# EAGLE board PCB 2D (EAGLE 9.7.0)
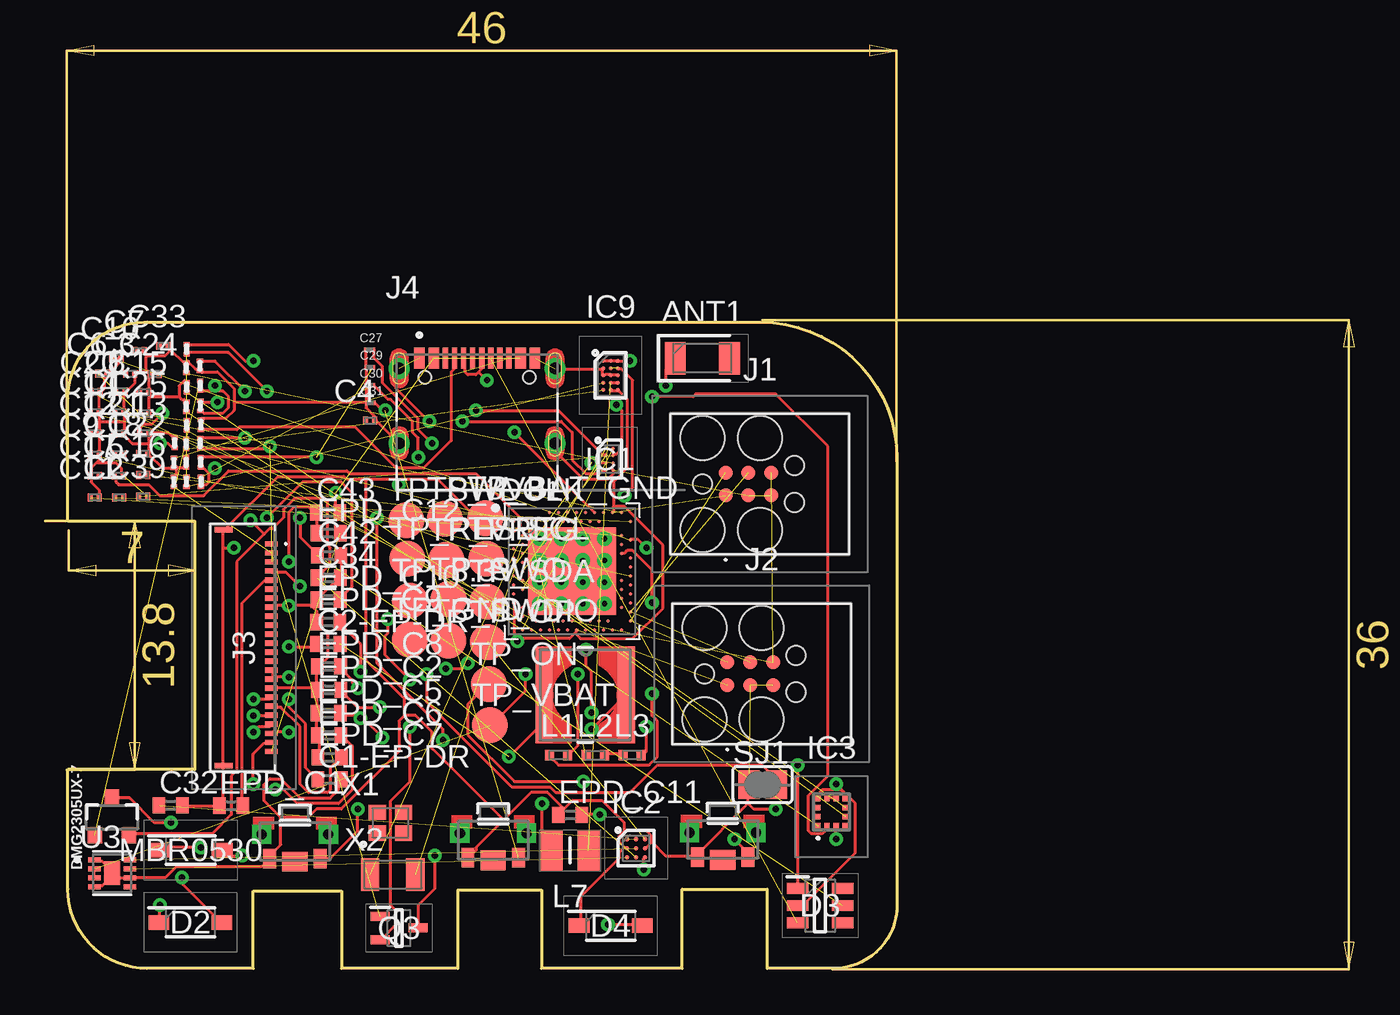
[diagram p0: board, top side]
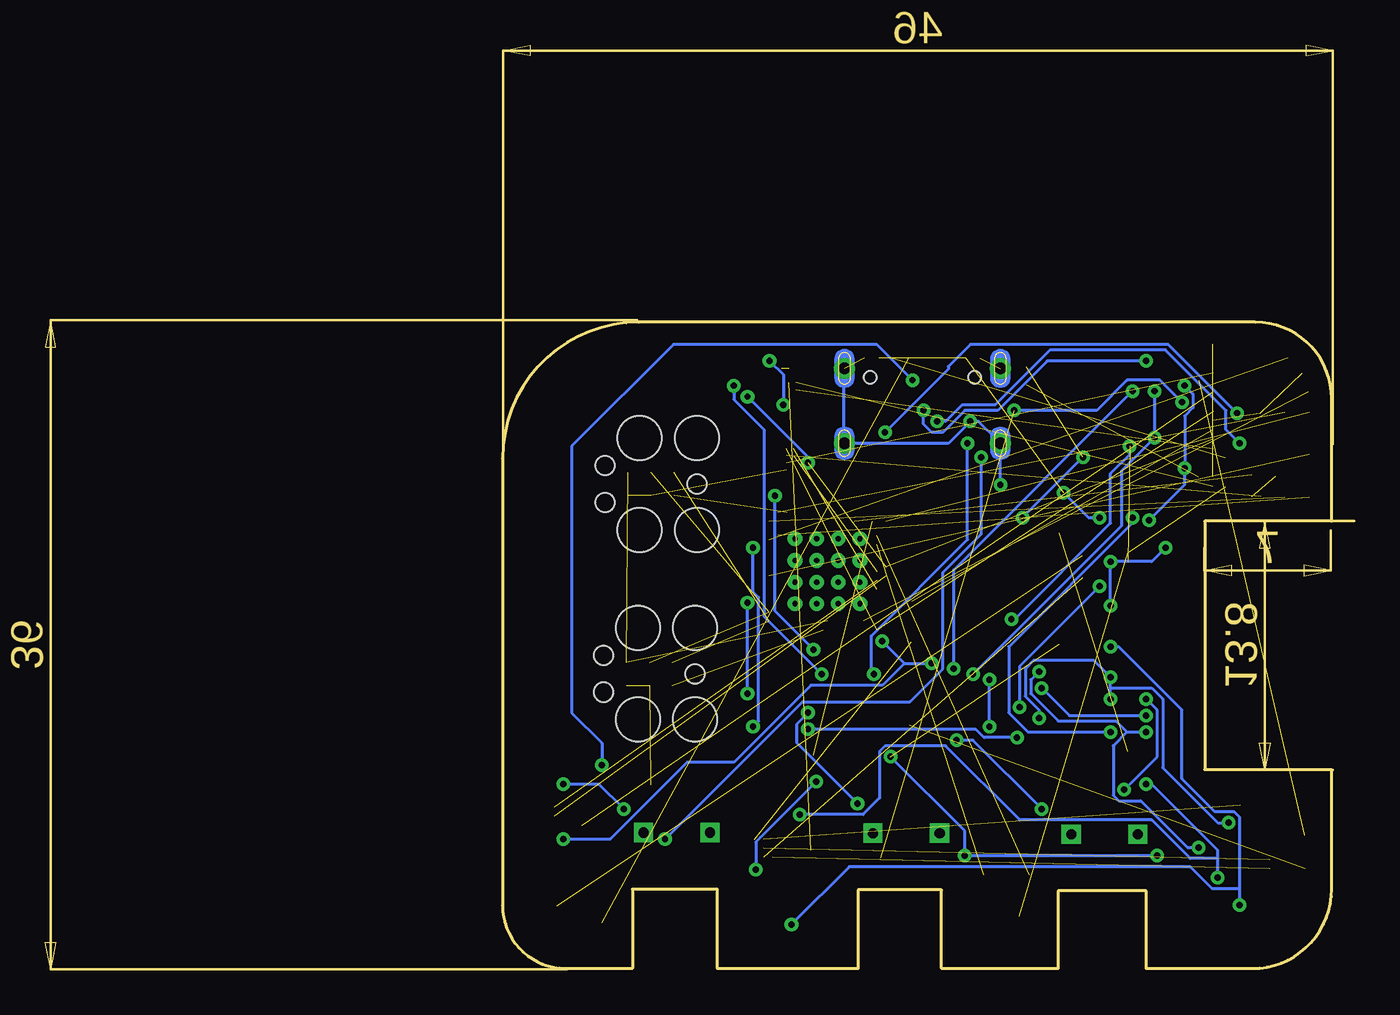
[diagram p1: board, bottom side, seen from below]

Size 45.96 x 35.83 mm. Coordinates in mm from the lower left corner, seen from the top.
Outline: 4.22,35.83 38.42,35.83 arc-90 45.96,28.28 45.96,3.49 arc-90 42.47,0 38.76,0 38.76,4.39 34.05,4.39 34.05,0 26.25,0 26.25,4.35 21.62,4.35 21.62,0 15.17,0 15.17,4.29 10.28,4.29 10.28,0 4.4,0 arc-90 0,4.4 0,11.02 7.04,11.02 7.04,24.8 0,24.8 0,31.6 arc-90 4.22,35.83
Copper layers (1*16): Top 0.035mm / dielectric 1.5mm / Bottom 0.035mm
Design rules "Fusion Electronics Design Rules *": minimum track width 6mil, minimum drill 0.35mm, track to track 6mil, track to pad 6mil, pad to pad 6mil, via to via 6mil, smd to smd 6mil, copper to edge 40mil, drill to drill 6mil, minimum pad ring 10mil, minimum via ring 8mil, stop-mask expansion 4mil, vias tented up to drill 9999mil, thermal gap 10mil

## Footprints (pad centres in the part's own frame; a part is rotated, then mirrored left to right if it is on the bottom)
2450AT18B100E_ANTC3216X140N = smd 1.15 x 1.8: 1 -1.5,0; 2 1.5,0
NORDIC_NRF_3_RESC0201_L = smd 0.28 x 0.43: 1 -0.255,0; 2 0.255,0
ESP32_C6_LIBRARY_1_ESP32_WROVER_EAGLE-LTSPICE_C0402 = smd 0.7 x 0.9: 1 -0.65,0; 2 0.65,0
GRM011R60J152KE01L_1_0201 = smd 0.35 x 0.25: 1 0,0.275; 2 0,-0.275
GRM011R60J152KE01L_2_CAPC0201X13N = smd 0.22 x 0.23: 1 -0.185,0; 2 0.185,0
ESP32_C6_LIBRARY_5_SOD3716X135N = smd 1.15 x 0.8: 1 -1.75,0; 2 1.75,0
ESP32_C6_LIBRARY_3_SOT95P280X145-6N = smd 1.2 x 0.6: 1 -1.25,0.95; 2 -1.25,0; 3 -1.25,-0.95; 4 1.25,-0.95; 5 1.25,0; 6 1.25,0.95
ESP32_C6_LIBRARY_4_ESP32_C6_LIBRARY_4_ESP32_C6_LIBRARY_4_ESP32_C6_LIBRARY_4_ESP32_WROVER_SPARKFUN-DISCRETESEMI_SOT23-3 = smd 0.8 x 0.9: 1 -0.95,-1; 2 0.95,-1; 3 0,1.1
BQ25180YBGR_BGA8C40P2X4_100X155X50 = smd 0.2 x 0.2: A1 -0.2,0.6; A2 0.2,0.6; B1 -0.2,0.2; B2 0.2,0.2; C1 -0.2,-0.2; C2 0.2,-0.2; D1 -0.2,-0.6; D2 0.2,-0.6
DRV2605YZFR_BGA9C50P3X3_144X144X62 = smd 0.25 x 0.25: A1 -0.5,0.5; A2 0,0.5; A3 0.5,0.5; B1 -0.5,0; B2 0,0; B3 0.5,0; C1 -0.5,-0.5; C2 0,-0.5; C3 0.5,-0.5
BMA423_BMA423 = smd 0.3 x 0.35: 1 -0.75,-0.775; 2 -0.25,-0.775; 3 0.25,-0.775; 4 0.75,-0.775; 7 0.75,0.775; 8 0.25,0.775; 9 -0.25,0.775; 10 -0.75,0.775 | smd 0.35 x 0.3: 5 0.775,-0.25; 6 0.775,0.25; 11 -0.775,0.25; 12 -0.775,-0.25
RT6160AWSC_BGA15C40P3X5_140X230X60 = smd 0.216 x 0.216: A1 -0.4,0.8; A2 0,0.8; A3 0.4,0.8; B1 -0.4,0.4; B2 0,0.4; B3 0.4,0.4; C1 -0.4,0; C2 0,0; C3 0.4,0; D1 -0.4,-0.4; D2 0,-0.4; D3 0.4,-0.4; E1 -0.4,-0.8; E2 0,-0.8; E3 0.4,-0.8
TC2030-IDC_TC2030IDC = smd 0.783 x 0.783: 1 -0.953,-0.635; 2 -0.953,0.635; 3 0.317,-0.635; 4 0.317,0.635; 5 1.588,-0.635; 6 1.588,0.635 | hole 2.451: -2.223,-2.54; -2.223,2.54; 0.952,-2.54; 0.952,2.54 | hole 1.067: -2.223,0; 2.857,-1.016; 2.857,1.016
503480-2400_5034802400 = smd 0.3 x 0.7: 1 -5.75,1.525; 2 -5.25,1.525; 3 -4.75,1.525; 4 -4.25,1.525; 5 -3.75,1.525; 6 -3.25,1.525; 7 -2.75,1.525; 8 -2.25,1.525; 9 -1.75,1.525; 10 -1.25,1.525; 11 -0.75,1.525; 12 -0.25,1.525; 13 0.25,1.525; 14 0.75,1.525; 15 1.25,1.525; 16 1.75,1.525; 17 2.25,1.525; 18 2.75,1.525; 19 3.25,1.525; 20 3.75,1.525; 21 4.25,1.525; 22 4.75,1.525; 23 5.25,1.525; 24 5.75,1.525 | smd 0.3 x 1: MP1 -6.54,-1.125; MP2 6.54,-1.125
KH-TYPE-C-16P_KINGHELM_KH-TYPE-C-16P = smd 0.6 x 1.15: A1_B12 -3.2,4.725; A4_B9 -2.4,4.725; A9_B4 2.4,4.725; A12_B1 3.2,4.725 | smd 0.3 x 1.15: A5 -1.25,4.725; A6 -0.25,4.725; A7 0.25,4.725; A8 1.25,4.725; B5 1.75,4.725; B6 0.75,4.725; B7 -0.75,4.725; B8 -1.75,4.725 | drill 0.65 pad 1.05: SH1 -4.32,0; SH2 4.32,0; SH3 -4.32,4.15; SH4 4.32,4.15 | hole 0.7: -2.89,3.65; 2.89,3.65
NORDIC_NRF_2_RESC0402_L = smd 0.5 x 0.6: 1 -0.5,0; 2 0.5,0
ESP32_C6_LIBRARY_2_IND_4828-WE-TPC_WRE = smd 0.9 x 5.3: 1 -2.286,0; 2 2.286,0
MLP2016SR47MT0S1_INDC2016X100N = smd 1.2 x 2.2: 1 -1.028,0; 2 1.028,0
ESP32_C6_LIBRARY_6_SOT65P210X110-3N = smd 1.05 x 0.5: 1 -1.05,0.65; 2 -1.05,-0.65; 3 1.05,0
CPF0201D7K68C1_0201 = smd 0.35 x 0.25: 1 0,0.275; 2 0,-0.275
ESP32_C6_LIBRARY_7_JUMPER_SJ = smd 1.168 x 1.6: 1 -0.762,0; 2 0.762,0
2025-10-22_07-23-44_LIBRARY_SW_EVP-AKE31A_PAN = smd 0.711 x 1.092: 1 -1.4,-0.972; 2 1.4,-0.972 | drill 0.559 pad 0.914 square: 3 -1.848,0.381; 4 1.848,0.381 | smd 1.397 x 1.092: 5 0,-1.124
HECTOR_WATCH_1_TP20R = smd 2 x 2: TP 0,0
NORDIC_NRF_4_AQFN50P700X700X85_HS-74N = smd 4.85 x 4.85: P$74 0,0 | drill 0.3 pad 0.6: P$75 -1.8,1.8; P$76 -0.6,1.8; P$77 0.6,1.8; P$78 1.8,1.8; P$79 -1.8,0.6; P$80 -0.6,0.6; P$81 0.6,0.6; P$82 1.8,0.6; P$83 -1.8,-0.6; P$84 -0.6,-0.6; P$85 0.6,-0.6; P$86 1.8,-0.6; P$87 -1.8,-1.8; P$88 -0.6,-1.8; P$89 0.6,-1.8; P$90 1.8,-1.8 | smd 0.2 x 0.2: P$A8 -1.25,3.25; P$A10 -0.75,3.25; P$A12 -0.25,3.25; P$A14 0.25,3.25; P$A16 0.75,3.25; P$A18 1.25,3.25; P$A20 1.75,3.25; P$A22 2.25,3.25; P$A23 2.75,3.25; P$AA24 3.25,-2.25; P$AB2 -2.75,-2.5; P$AC5 -2,-2.75; P$AC9 -1,-2.75; P$AC11 -0.5,-2.75; P$AC13 0,-2.75; P$AC15 0.5,-2.75; P$AC17 1,-2.75; P$AC19 1.5,-2.75; P$AC21 2,-2.75; P$AC24 3.25,-2.75; P$AD2 -2.75,-3.25; P$AD4 -2.25,-3.25; P$AD6 -1.75,-3.25; P$AD8 -1.25,-3.25; P$AD10 -0.75,-3.25; P$AD12 -0.25,-3.25; P$AD14 0.25,-3.25; P$AD16 0.75,-3.25; P$AD18 1.25,-3.25; P$AD20 1.75,-3.25; P$AD22 2.25,-3.25; P$AD23 2.75,-3.25; P$B1 -3.25,2.75; P$B3 -2.5,2.75; P$B5 -2,2.75; P$B7 -1.5,2.75; P$B9 -1,2.75; P$B11 -0.5,2.75; P$B13 0,2.75; P$B15 0.5,2.75; P$B17 1,2.75; P$B19 1.5,2.75; P$B24 3.25,2.75; P$C1 -3.25,2.25; P$D2 -2.75,2; P$D23 2.75,2; P$E24 3.25,1.75; P$F2 -2.75,1.5; P$F23 2.75,1.5; P$G1 -3.25,1.25; P$H2 -2.75,1; P$H23 2.75,1; P$J1 -3.25,0.75; P$J24 3.25,0.75; P$K2 -2.75,0.5; P$L1 -3.25,0.25; P$L24 3.25,0.25; P$M2 -2.75,0; P$N1 -3.25,-0.25; P$N24 3.25,-0.25; P$P2 -2.75,-0.5; P$P23 2.75,-0.5; P$R1 -3.25,-0.75; P$R24 3.25,-0.75; P$T2 -2.75,-1; P$T23 2.75,-1; P$U1 -3.25,-1.25; P$U24 3.25,-1.25; P$V23 2.75,-1.5; P$W1 -3.25,-1.75; P$W24 3.25,-1.75; P$Y2 -2.75,-2; P$Y23 2.75,-2
ESP32_C6_LIBRARY_SON50P200X200X80-9N = smd 0.76 x 0.27: 1 -0.985,0.75; 2 -0.985,0.25; 3 -0.985,-0.25; 4 -0.985,-0.75; 5 0.985,-0.75; 6 0.985,-0.25; 7 0.985,0.25; 8 0.985,0.75 | smd 0.9 x 1.3: 9 0,0
NORDIC_NRF_BT-XTAL_2016_N = smd 0.95 x 0.85: 1 -0.725,-0.575; 2 0.725,-0.575; 3 0.725,0.575; 4 -0.725,0.575
NORDIC_NRF_1_XTAL_3215_N = smd 1 x 1.8: 1 -1.25,0; 2 1.25,0

## Placement (x,y rotation side)
ANT1  2450AT18B100E  [2450AT18B100E_ANTC3216X140N]  35.17,33.83 0 top
C1  12pF  [NORDIC_NRF_3_RESC0201_L]  2.84,30.83 0 top
C1-EP-DR  10uF  [ESP32_C6_LIBRARY_1_ESP32_WROVER_EAGLE-LTSPICE_C0402]  14.5,10.48 0 top
C2  12pF  [NORDIC_NRF_3_RESC0201_L]  2.84,26.11 0 top
C2-EP-DR  4.7uF/25V  [ESP32_C6_LIBRARY_1_ESP32_WROVER_EAGLE-LTSPICE_C0402]  14.44,17.98 0 top
C3  1pF  [NORDIC_NRF_3_RESC0201_L]  3.46,32.97 0 top
C4  1pF  [NORDIC_NRF_3_RESC0201_L]  16.75,30.37 0 top
C5  100nF  [NORDIC_NRF_3_RESC0201_L]  2.83,27.31 0 top
C6  4.7µF  [NORDIC_NRF_3_RESC0201_L]  1.92,32.98 0 top
C7  100nF  [NORDIC_NRF_3_RESC0201_L]  3.99,34.22 0 top
C8  100nF  [NORDIC_NRF_3_RESC0201_L]  2.92,31.99 0 top
C9  820pF  [NORDIC_NRF_3_RESC0201_L]  1.49,28.49 0 top
C10  N.C  [NORDIC_NRF_3_RESC0201_L]  2.69,33.84 0 top
C11  100pF  [NORDIC_NRF_3_RESC0201_L]  1.49,26.11 0 top
C12  100nF  [NORDIC_NRF_3_RESC0201_L]  1.49,29.67 0 top
C13  N.C  [NORDIC_NRF_3_RESC0201_L]  4.24,29.67 0 top
C14  4.7µF  [NORDIC_NRF_3_RESC0201_L]  1.49,30.82 0 top
C15  1.0µF  [NORDIC_NRF_3_RESC0201_L]  4.22,31.95 0 top
C16  47nF  [NORDIC_NRF_3_RESC0201_L]  4.17,27.35 0 top
C17  12pF  [NORDIC_NRF_3_RESC0201_L]  1.49,27.31 0 top
C18  12pF  [NORDIC_NRF_3_RESC0201_L]  2.85,28.5 0 top
C20  4.7µF  [NORDIC_NRF_3_RESC0201_L]  1.54,31.95 0 top
C21  4.7µF  [NORDIC_NRF_3_RESC0201_L]  2.84,29.66 0 top
C22  N.C  [NORDIC_NRF_3_RESC0201_L]  4.18,28.53 0 top
C23  0.1uF  [GRM011R60J152KE01L_1_0201]  6.56,28.05 0 top
C24  10uF  [NORDIC_NRF_3_RESC0201_L]  4.81,32.96 0 top
C25  22uF  [NORDIC_NRF_3_RESC0201_L]  4.23,30.77 0 top
C27  0.1uF  [GRM011R60J152KE01L_2_CAPC0201X13N]  16.73,34.29 0 top
C29  1uF  [GRM011R60J152KE01L_2_CAPC0201X13N]  16.74,33.33 0 top
C30  1uF  [GRM011R60J152KE01L_2_CAPC0201X13N]  16.73,32.33 0 top
C31  1uF  [GRM011R60J152KE01L_2_CAPC0201X13N]  16.77,31.36 0 top
C32  1uF  [ESP32_C6_LIBRARY_1_ESP32_WROVER_EAGLE-LTSPICE_C0402]  5.7,9.04 0 top
C33  22uF  [NORDIC_NRF_3_RESC0201_L]  5.3,34.52 0 top
C34  0.1uF  [ESP32_C6_LIBRARY_1_ESP32_WROVER_EAGLE-LTSPICE_C0402]  14.47,21.66 0 top
C37  1uF  [GRM011R60J152KE01L_1_0201]  6.56,33.29 0 top
C38  1uF  [GRM011R60J152KE01L_1_0201]  6.56,31.15 0 top
C39  10uF  [NORDIC_NRF_3_RESC0201_L]  4.18,26.16 0 top
C42  0.1uF  [ESP32_C6_LIBRARY_1_ESP32_WROVER_EAGLE-LTSPICE_C0402]  14.48,22.89 0 top
C43  4.7uF  [ESP32_C6_LIBRARY_1_ESP32_WROVER_EAGLE-LTSPICE_C0402]  14.42,25.28 0 top
D2  MBR0530  [ESP32_C6_LIBRARY_5_SOD3716X135N]  6.79,2.55 0 top
D3  USBLC6-2SC6Y  [ESP32_C6_LIBRARY_3_SOT95P280X145-6N]  41.7,3.49 0 top
D4  MBR0530  [ESP32_C6_LIBRARY_5_SOD3716X135N]  30.09,2.37 0 top
DMG2305UX-7  20V/4.2A/52mΩ/1.4W  [ESP32_C6_LIBRARY_4_ESP32_C6_LIBRARY_4_ESP32_C6_LIBRARY_4_ESP32_C6_LIBRARY_4_ESP32_WROVER_SPARKFUN-DISCRETESEMI_SOT23-3]  2.44,8.38 0 top
EPD_C1  1uF/50V  [ESP32_C6_LIBRARY_1_ESP32_WROVER_EAGLE-LTSPICE_C0402]  9.05,9.02 0 top
EPD_C2  1uF/50V  [ESP32_C6_LIBRARY_1_ESP32_WROVER_EAGLE-LTSPICE_C0402]  14.49,15.45 0 top
EPD_C5  1uF/50V  [ESP32_C6_LIBRARY_1_ESP32_WROVER_EAGLE-LTSPICE_C0402]  14.45,14.15 0 top
EPD_C6  1uF/50V  [ESP32_C6_LIBRARY_1_ESP32_WROVER_EAGLE-LTSPICE_C0402]  14.48,12.92 0 top
EPD_C7  1uF/50V  [ESP32_C6_LIBRARY_1_ESP32_WROVER_EAGLE-LTSPICE_C0402]  14.51,11.69 0 top
EPD_C8  1uF/50V  [ESP32_C6_LIBRARY_1_ESP32_WROVER_EAGLE-LTSPICE_C0402]  14.47,16.74 0 top
EPD_C9  1uF/50V  [ESP32_C6_LIBRARY_1_ESP32_WROVER_EAGLE-LTSPICE_C0402]  14.44,19.2 0 top
EPD_C10  1uF/50V  [ESP32_C6_LIBRARY_1_ESP32_WROVER_EAGLE-LTSPICE_C0402]  14.45,20.44 0 top
EPD_C11  1uF/50V  [ESP32_C6_LIBRARY_1_ESP32_WROVER_EAGLE-LTSPICE_C0402]  27.84,8.51 0 top
EPD_C12  1uF/50V  [ESP32_C6_LIBRARY_1_ESP32_WROVER_EAGLE-LTSPICE_C0402]  14.45,24.13 0 top
IC1  BQ25180YBGR  [BQ25180YBGR_BGA8C40P2X4_100X155X50]  30.03,28.23 0 top
IC2  DRV2605YZFR  [DRV2605YZFR_BGA9C50P3X3_144X144X62]  31.5,6.67 0 top
IC3  BMA421  [BMA423_BMA423]  42.33,8.67 0 top
IC9  RT6160AWSC  [RT6160AWSC_BGA15C40P3X5_140X230X60]  30.09,32.88 0 top
J1  TC2030-IDC_TC2030-IDC  [TC2030-IDC_TC2030IDC]  37.41,26.85 0 top
J2  TC2030-IDC  [TC2030-IDC_TC2030IDC]  37.51,16.33 0 top
J3  503480-2400  [503480-2400_5034802400]  9.76,17.78 270 top
J4  KH-TYPE-C-16P  [KH-TYPE-C-16P_KINGHELM_KH-TYPE-C-16P]  22.69,29.12 0 top
L1  3.9nH  [NORDIC_NRF_2_RESC0402_L]  27.21,11.83 0 top
L2  10µH  [NORDIC_NRF_2_RESC0402_L]  29.24,11.82 0 top
L3  15nH  [NORDIC_NRF_2_RESC0402_L]  31.28,11.83 0 top
L5  68uH  [ESP32_C6_LIBRARY_2_IND_4828-WE-TPC_WRE]  28.67,15.16 0 top
L7  FTC252012SR47MBCA  [MLP2016SR47MT0S1_INDC2016X100N]  27.84,6.55 0 top
MBR0530  D5  [ESP32_C6_LIBRARY_5_SOD3716X135N]  6.81,6.56 0 top
Q3  SI1308EDL-T1-GE3  [ESP32_C6_LIBRARY_6_SOT65P210X110-3N]  18.36,2.24 0 top
R1_EP_DR  0.47  [CPF0201D7K68C1_0201]  7.34,29.12 0 top
R1_USB  5K1  [CPF0201D7K68C1_0201]  7.38,30.15 0 top
R2  0  [CPF0201D7K68C1_0201]  6.56,29.08 0 top
R2_EP_DR  10K  [CPF0201D7K68C1_0201]  5.89,26.97 0 top
R2_USB  5K1  [CPF0201D7K68C1_0201]  5.88,28.02 0 top
R3  0  [CPF0201D7K68C1_0201]  6.58,32.23 0 top
R4  0  [CPF0201D7K68C1_0201]  6.57,26.99 0 top
R5  10K  [CPF0201D7K68C1_0201]  7.38,26.98 0 top
R7  10K  [CPF0201D7K68C1_0201]  7.37,28.07 0 top
R8  10K  [CPF0201D7K68C1_0201]  7.35,31.19 0 top
R9  10K  [CPF0201D7K68C1_0201]  5.93,29.13 0 top
R17  3K3  [CPF0201D7K68C1_0201]  6.58,34.33 0 top
R18  3K3  [CPF0201D7K68C1_0201]  6.58,30.11 0 top
R_PWR_EPD  10K  [CPF0201D7K68C1_0201]  7.33,32.31 0 top
R_TYPE_SEL  2.2  [CPF0201D7K68C1_0201]  7.32,33.41 0 top
SJ1  [ESP32_C6_LIBRARY_7_JUMPER_SJ]  38.51,10.19 0 top
SW_DN  2025-10-22_07-23-44_LIBRARY_EVP-AKE31ASW_EVP-AKE31A_PAN  [2025-10-22_07-23-44_LIBRARY_SW_EVP-AKE31A_PAN]  12.59,7.05 0 top
SW_ENT  2025-10-22_07-23-44_LIBRARY_EVP-AKE31ASW_EVP-AKE31A_PAN  [2025-10-22_07-23-44_LIBRARY_SW_EVP-AKE31A_PAN]  23.58,7.12 0 top
SW_UP  2025-10-22_07-23-44_LIBRARY_EVP-AKE31ASW_EVP-AKE31A_PAN  [2025-10-22_07-23-44_LIBRARY_SW_EVP-AKE31A_PAN]  36.3,7.15 0 top
TP_3.3V  HECTOR_WATCH_1_TPTP20R  [HECTOR_WATCH_1_TP20R]  18.95,20.39 0 top
TP_3V3  HECTOR_WATCH_1_TPTP20R  [HECTOR_WATCH_1_TP20R]  20.91,24.93 0 top
TP_BAT_GND  HECTOR_WATCH_1_TPTP20R  [HECTOR_WATCH_1_TP20R]  23.14,24.96 0 top
TP_GND  HECTOR_WATCH_1_TPTP20R  [HECTOR_WATCH_1_TP20R]  18.95,18.23 0 top
TP_ON  HECTOR_WATCH_1_TPTP20R  [HECTOR_WATCH_1_TP20R]  23.35,15.75 0 top
TP_OP  HECTOR_WATCH_1_TPTP20R  [HECTOR_WATCH_1_TP20R]  23.29,18.09 0 top
TP_RESET  HECTOR_WATCH_1_TPTP20R  [HECTOR_WATCH_1_TP20R]  18.82,22.7 0 top
TP_SCL  HECTOR_WATCH_1_TPTP20R  [HECTOR_WATCH_1_TP20R]  23.19,22.71 0 top
TP_SDA  HECTOR_WATCH_1_TPTP20R  [HECTOR_WATCH_1_TP20R]  23.26,20.34 0 top
TP_SWDCLK  HECTOR_WATCH_1_TPTP20R  [HECTOR_WATCH_1_TP20R]  18.76,24.85 0 top
TP_SWDIO  HECTOR_WATCH_1_TPTP20R  [HECTOR_WATCH_1_TP20R]  21.1,18.16 0 top
TP_SWO  HECTOR_WATCH_1_TPTP20R  [HECTOR_WATCH_1_TP20R]  21.11,20.46 0 top
TP_VBAT  HECTOR_WATCH_1_TPTP20R  [HECTOR_WATCH_1_TP20R]  23.4,13.48 0 top
TP_VREG  HECTOR_WATCH_1_TPTP20R  [HECTOR_WATCH_1_TP20R]  20.97,22.64 0 top
U1  NRF52840_QF  [NORDIC_NRF_4_AQFN50P700X700X85_HS-74N]  27.95,22.01 0 top
U3  MAX17048G+T10  [ESP32_C6_LIBRARY_SON50P200X200X80-9N]  2.46,5.27 0 top
X1  32MHz  [NORDIC_NRF_BT-XTAL_2016_N]  17.88,8.08 0 top
X2  32.768kHz  [NORDIC_NRF_1_XTAL_3215_N]  18.01,5.2 0 top

## Library data of the parts
ANT1 = InkTime_v5; ARROW_PART_NUMBER: 2450AT18B100E; ARROW_PRICE-STOCK: https://www.arrow.com/en/products/2450at18b100e/johanson-dielectrics?utm_currency=USD&region=nac; DESCRIPTION: Antennas 2.45GHz ANTENNA; HEIGHT: 1.4mm; MANUFACTURER_NAME: JOHANSON TECHNOLOGY; MANUFACTURER_PART_NUMBER: 2450AT18B100E; MOUSER_PART_NUMBER: 609-2450AT18B100E; MOUSER_PRICE-STOCK: https://www.mouser.co.uk/ProductDetail/Johanson-Technology/2450AT18B100E?qs=yCnrNFeXz%252Bh5MFsFIXGZGA%3D%3D
C1-C18 C20-C25 C33 C37-C39 L1-L3 R1_EP_DR R1_USB R2 R2_EP_DR R2_USB R3-R5 R7-R9 R17 R18 R_PWR_EPD R_TYPE_SEL SJ1 TP_3.3V TP_3V3 TP_BAT_GND TP_GND TP_ON TP_OP TP_RESET TP_SCL TP_SDA TP_SWDCLK TP_SWDIO TP_SWO TP_VBAT TP_VREG U1 X1 X2 = InkTime_v5
C1-EP-DR C2-EP-DR C32 C34 C42 C43 EPD_C1 EPD_C2 EPD_C5-EPD_C12 = InkTime_v5; SPICEMODEL: NONE; SPICEPREFIX: C
C27 C29-C31 = InkTime_v5; AVAILABILITY: In Stock; CHECK_PRICES: https://www.snapeda.com/parts/GRM011R60J152KE01L/Murata/view-part/?ref=eda; DESCRIPTION: SMD Capacitor X5R(EIA) with Capacitance: 1500pF Tol. 10%. Rated Voltage: 6.3Vdc; MF: Murata; MP: GRM011R60J152KE01L; PACKAGE: 0201 Murata; PRICE: None; SNAPEDA_LINK: https://www.snapeda.com/parts/GRM011R60J152KE01L/Murata/view-part/?ref=snap
D2 D4 MBR0530 = InkTime_v5; AVAILABILITY: In Stock; CHECK_PRICES: https://www.snapeda.com/parts/MBR0530/Onsemi/view-part/?ref=eda; DESCRIPTION: Diode Schottky 30 V 500mA Surface Mount SOD-123; MF: ON Semiconductor; MP: MBR0530; PACKAGE: SOD-123-2 ON Semiconductor; PRICE: None; PURCHASE-URL: https://www.snapeda.com/api/url_track_click_mouser/?unipart_id=179458&manufacturer=ON Semiconductor&part_name=MBR0530&search_term=None; SNAPEDA_LINK: https://www.snapeda.com/parts/MBR0530/Onsemi/view-part/?ref=snap
D3 = InkTime_v5; AVAILABILITY: In Stock; CHECK_PRICES: https://www.snapeda.com/parts/USBLC6-2SC6Y/STMicroelectronics/view-part/?ref=eda; DESCRIPTION: 17V Clamp 5A (8/20µs) Ipp Tvs Diode Surface Mount SOT-23-6; MF: STMicroelectronics; MP: USBLC6-2SC6Y; PACKAGE: SOT-23-6 STMicroelectronics; PRICE: None; SNAPEDA_LINK: https://www.snapeda.com/parts/USBLC6-2SC6Y/STMicroelectronics/view-part/?ref=snap
DMG2305UX-7 = InkTime_v5; PROD_ID: TRAN-14388
IC1 = InkTime_v5; ARROW_PART_NUMBER: BQ25180YBGR; ARROW_PRICE-STOCK: https://www.arrow.com/en/products/bq25180ybgr/texas-instruments?utm_currency=USD&region=nac; DESCRIPTION: Charger IC Lithium Ion/Polymer, Lithium Iron Phosphate 8-DSBGA (1.6x1.1); HEIGHT: 0.5mm; MANUFACTURER_NAME: Texas Instruments; MANUFACTURER_PART_NUMBER: BQ25180YBGR; MOUSER_PART_NUMBER: 595-BQ25180YBGR; MOUSER_PRICE-STOCK: https://www.mouser.co.uk/ProductDetail/Texas-Instruments/BQ25180YBGR?qs=doiCPypUmgEWjAK%252BJAX6Tw%3D%3D
IC2 = InkTime_v5; ARROW_PART_NUMBER: DRV2605YZFR; ARROW_PRICE-STOCK: https://www.arrow.com/en/products/drv2605yzfr/texas-instruments?region=nac; DESCRIPTION: Haptic Driver for ERM/LRA with Built-In Library and Smart Loop Architecture; HEIGHT: 0.625mm; MANUFACTURER_NAME: Texas Instruments; MANUFACTURER_PART_NUMBER: DRV2605YZFR
IC3 = InkTime_v5; ARROW_PART_NUMBER: BMA423; ARROW_PRICE-STOCK: https://www.arrow.com/en/products/bma423/bosch; DESCRIPTION: Accelerometers Triaxial low-g 12bit Acceleration Sensor; HEIGHT: 1mm; MANUFACTURER_NAME: BOSCH; MANUFACTURER_PART_NUMBER: BMA423; MOUSER_PART_NUMBER: 262-BMA423; MOUSER_PRICE-STOCK: https://www.mouser.co.uk/ProductDetail/Bosch-Sensortec/BMA423?qs=HXFqYaX1Q2xC%252BSgeGoX3mg%3D%3D
IC9 = InkTime_v5; DESCRIPTION: Buck-Boost Regulator Positive Output Step-Up/Step-Down I2C DC-DC Controller IC 15-WL-CSP (BSC) (1.4x2.3); HEIGHT: 0.6mm; MANUFACTURER_NAME: RICHTEK; MANUFACTURER_PART_NUMBER: RT6160AWSC; MOUSER_PART_NUMBER: 835-RT6160AWSC; MOUSER_PRICE-STOCK: https://www.mouser.co.uk/ProductDetail/Richtek/RT6160AWSC?qs=amGC7iS6iy%2FLd9PSoixZXQ%3D%3D
J1 J2 = InkTime_v5; DESCRIPTION: CABLE ADAPTER 6 POS; HEIGHT: 19mm; MANUFACTURER_NAME: Tag Connect; MANUFACTURER_PART_NUMBER: TC2030-IDC
J3 = InkTime_v5; DESCRIPTION: FFC & FPC Connectors 0.5mm FPC RA SMT Dual Contact 24Ckt; HEIGHT: 1.87mm; MANUFACTURER_NAME: Molex; MANUFACTURER_PART_NUMBER: 503480-2400; MOUSER_PART_NUMBER: 538-503480-2400; MOUSER_PRICE-STOCK: https://www.mouser.co.uk/ProductDetail/Molex/503480-2400?qs=OAhjpuo3Vu7efIoxFh9AOw%3D%3D
J4 = InkTime_v5; AVAILABILITY: Not in stock; CHECK_PRICES: https://www.snapeda.com/parts/KH-TYPE-C-16P/Kinghelm/view-part/?ref=eda; MF: kinghelm; MP: KH-TYPE-C-16P; PACKAGE: None; PRICE: None; SNAPEDA_LINK: https://www.snapeda.com/parts/KH-TYPE-C-16P/Kinghelm/view-part/?ref=snap
L5 = InkTime_v5; COPYRIGHT: Copyright (C) 2024 Ultra Librarian. All rights reserved.; MANUFACTURER_PART_NUMBER: 744043680; MFR_NAME: Wurth Electronics
L7 = InkTime_v5; DESCRIPTION: SMD / SMT Inductors (Coils), L=0.47?H, L x W x T :; HEIGHT: 1mm; JLCPCB: https://jlcpcb.com/partdetail/6763488-FTC252012SR47MBCA/C5832368; MANUFACTURER_NAME: TDK; MANUFACTURER_PART_NUMBER: FTC252012SR47MBCA
Q3 = InkTime_v5; AVAILABILITY: In Stock; CHECK_PRICES: https://www.snapeda.com/parts/SI1308EDL-T1-GE3/Vishay+Siliconix/view-part/?ref=eda; DESCRIPTION: Si1308EDL-T1-GE3 N-channel MOSFET Transistor, 1.5 A, 30 V, 3-Pin SC-70 | Siliconix / Vishay SI1308EDL-T1-GE3; MF: Vishay Siliconix; MP: SI1308EDL-T1-GE3; PACKAGE: SOT-323 Vishay Semiconductor; PRICE: None; PURCHASE-URL: https://www.snapeda.com/api/url_track_click_mouser/?unipart_id=274603&manufacturer=Vishay Siliconix&part_name=SI1308EDL-T1-GE3&search_term=None; SNAPEDA_LINK: https://www.snapeda.com/parts/SI1308EDL-T1-GE3/Vishay+Siliconix/view-part/?ref=snap
SW_DN SW_ENT SW_UP = InkTime_v5; COPYRIGHT: Copyright (C) 2025 Ultra Librarian. All rights reserved.; DIGI-KEY_PART_NUMBER_1: P123437TR-ND; DIGI-KEY_PART_NUMBER_2: P123437CT-ND; DIGI-KEY_PART_NUMBER_3: P123437DKR-ND; MANUFACTURER_NAME: Panasonic; MANUFACTURER_PART_NUMBER: EVP-AKE31A
U3 = InkTime_v5; AVAILABILITY: In Stock; CHECK_PRICES: https://www.snapeda.com/parts/MAX17048G+T10/Analog+Devices/view-part/?ref=eda; DESCRIPTION: 3µA 1-Cell/2-Cell Fuel Gauge with ModelGauge; MF: Analog Devices; MP: MAX17048G+T10; PACKAGE: TDFN-8 Maxim; PRICE: None; PURCHASE-URL: https://www.snapeda.com/api/url_track_click_mouser/?unipart_id=329239&manufacturer=Analog Devices&part_name=MAX17048G+T10&search_term=None; SNAPEDA_LINK: https://www.snapeda.com/parts/MAX17048G+T10/Analog+Devices/view-part/?ref=snap

## Nets
3V3/1.7D: C34.1 DMG2305UX-7.2 IC2.C2 R5.2 R7.2 R8.2 R_PWR_EPD.2
3V3/2.4A: C6.1 C25.1 IC3.3 IC9.E2 IC9.E3 J1.1 J2.1 R17.2 R18.1 U1.P$A22 U1.P$AD14 U1.P$W1
ALERT/1.6C: U3.5
ALERT/2.5C: U1.P$J24
D+/1.5D: D3.4
D+/2.7D: U1.P$AD6
D-/1.5D: D3.6
D-/2.7D: U1.P$AD4
DEC1: C5.1 U1.P$C1
DEC3: C11.1 U1.P$D23
DEC4_6: C10.1 L3.2 U1.P$E24
DN: D3.1 J4.A7 J4.B7
DP: D3.3 J4.A6 J4.B6
EPD_3V3: C1-EP-DR.1 DMG2305UX-7.3 EPD_C5.2 J3.15 J3.16 L5.2
EPD_BUSY/1.5D: J3.9
EPD_BUSY/2.2D: U1.P$AD12
EPD_CS/1.4C: J3.12
EPD_CS/2.2D: U1.P$K2
EPD_DC/1.5D: J3.11
EPD_DC/2.2D: U1.P$AD10
EPD_RST/1.5D: J3.10
EPD_RST/2.2D: U1.P$AC11
GDR: J3.2 Q3.1 R2_EP_DR.2
GND: C1-EP-DR.2 C1.2 C3.2 C4.2 C5.2 C6.2 C7.2 C8.2 C9.2 C10.2 C11.2 C12.2 C13.2 C14.2 C15.2 C17.1 C20.2 C21.2 C22.2 C23.2 C24.1 C25.2 C27.1 C29.1 C30.1 C31.1 C32.2 C33.2 C34.2 C37.1 C38.1 C39.2 C42.2 C43.1 D3.2 D4.1 EPD_C1.1 EPD_C2.1 EPD_C5.1 EPD_C6.1 EPD_C7.1 EPD_C8.1 EPD_C9.1 EPD_C10.1 EPD_C11.1 EPD_C12.1 IC1.D2 IC2.B1 IC2.B3 IC3.7 IC3.10 IC9.B1 IC9.C1 IC9.C2 IC9.C3 J1.3 J1.5 J2.3 J2.5 J3.8 J3.17 J3.MP1 J3.MP2 J4.A1_B12 J4.A12_B1 J4.SH1 J4.SH2 J4.SH3 J4.SH4 R1_USB.1 R2_EP_DR.1 R2_USB.2 R3.1 R9.1 R_TYPE_SEL.2 SJ1.1 SW_DN.1 SW_ENT.1 SW_UP.1 TP_BAT_GND.TP U3.1 U3.4 U3.6 U3.9
HAPTIC_EN/1.4C: IC2.A1
HAPTIC_EN/2.6A: U1.P$U1
IMU_INT1: IC3.5 U1.P$N1
IMU_INT2: IC3.6 U1.P$P2
LX1: IC9.B2 IC9.B3 L7.1
LX2: IC9.D2 IC9.D3 L7.2
MOSI/1.5B: J3.14
MOSI/2.2D: U1.P$B13
N$1: C24.2
N$2: IC1.D1 R9.2
N$4: C23.1
N$5: IC9.D1 R4.2
N$6: IC9.E1 R2.2
N$7: C33.1
N$8: IC3.8 IC3.9
N$9: IC3.1 R3.2
N$10: C2-EP-DR.2 L5.1 MBR0530.2 Q3.3
N$11: R18.2 TP_SDA.TP
N$12: TP_SCL.TP
N$13: C14.1 U1.P$B1
N$14: IC3.12
N$15: L2.2 L3.1
N$16: U1.P$D2 X2.1
N$17: C17.2
N$18: U1.P$F2 X2.2
N$19: C18.1
N$20: C18.2
N$21: C21.1
N$23: U1.P$Y2
N$24: C20.1 U1.P$AC5
N$25: C7.1
N$26: C2-EP-DR.1 D2.1 D4.2
N$27: L2.1 U1.P$B3
N$28: U1.P$B5
N$29: C16.2 U1.P$B7
N$30: C15.1
N$31: C16.1
N$32: C13.1 U1.P$A18
N$33: C1.1 U1.P$A23
N$34: C12.1
N$35: C2.1 U1.P$B24
N$36: X1.3
N$37: X1.1
N$41: C2.2
N$45: X1.4
N$47: X1.2
N$48: C9.1 U1.P$N24
N$49: U1.P$AD23
N$50: C8.1
N$51: L1.1 U1.P$H23
N$52: C3.1
N$54: R1_EP_DR.1 R_TYPE_SEL.1 SJ1.2
N$55: C4.1
N$56: C22.1
N$58: U1.P$F23
N$59: C32.1 IC2.A2
N$60: EPD_C2.2 J3.4
N$61: EPD_C1.2 J3.5
N$62: EPD_C7.2 J3.19
N$63: EPD_C8.2 J3.20
N$64: EPD_C10.2 J3.22
N$65: EPD_C12.2 J3.24
N$66: EPD_C6.2 J3.18
N$67: J4.A5 R1_USB.2
N$68: J4.B5 R2_USB.1
OUT+: IC2.A3 TP_OP.TP
OUT-: IC2.C3 TP_ON.TP
P0.04: U1.P$J1
P0.09: U1.P$L24
P0.13/1.5D: C30.2 R5.1 SW_UP.2
P0.13/2.6C: U1.P$AD8
P0.14/1.5D: C31.2 R8.1 SW_ENT.2
P0.14/2.7C: U1.P$AC9
P0.19: U1.P$AC15
P0.20: U1.P$AD16
P0.21: U1.P$AC17
P0.22: U1.P$AD18
P0.23: U1.P$AC19
P0.24: U1.P$AD20
P0.25: U1.P$AC21
P0.26: U1.P$G1
P0.27: U1.P$H2
P0.28: U1.P$B11
P0.29: U1.P$A10
P0.30: U1.P$B9
P0.31: U1.P$A8
P1.01/1.6C: DMG2305UX-7.1 R_PWR_EPD.1
P1.01/2.4B: U1.P$Y23
P1.02/1.6C: C29.2 R7.1 SW_DN.2
P1.02/2.8C: U1.P$W24
P1.03: U1.P$V23
P1.04: U1.P$U24
P1.05: U1.P$T23
P1.06: U1.P$R24
P1.07: U1.P$P23
P1.09: U1.P$R1
P1.10: U1.P$A20
P1.11: U1.P$B19
P1.12: U1.P$B17
P1.13: U1.P$A16
P1.14: U1.P$B15
P1.15: U1.P$A14
PMIC_INT: IC1.A1 U1.P$T2
PREVGH: EPD_C9.2 J3.21 MBR0530.1
PREVGL: D2.2 EPD_C11.2 J3.23
RESE: J3.3 Q3.2 R1_EP_DR.2
RESET: J1.6 J2.6 U1.P$AC13
RF: ANT1.1 L1.2
SCK/1.5B: J3.13
SCK/2.2D: U1.P$A12
SCL/1.4C: IC2.C1 U3.7
SCL/2.4C: IC1.B1 R4.1 R17.1 U1.P$M2
SDA/1.4C: IC2.B2 U3.8
SDA/2.4C: IC1.C1 IC3.2 R2.1 U1.P$L1
SWDCLK: J1.4 J2.4 U1.P$AA24
SWDIO: J1.2 J2.2 U1.P$AC24
SWO: U1.P$AD22
VBAT/1.2A: C27.2 TP_VBAT.TP U3.2 U3.3
VBAT/2.5C: C37.2 IC1.C2
VBUS/1.5D: C42.1 C43.2 D3.5 J4.A4_B9 J4.A9_B4
VBUS/2.6D: C38.2 IC1.A2 U1.P$AD2
VREG: C39.1 IC1.B2 IC9.A1 IC9.A2 IC9.A3

## Tracks (layer width: path | path; a pad name or v marks a point on that pad's centre or on a via)
3V3/1.7D  (via drill 0.35)  (1 unrouted)
  Top 0.152: 7.84,27.43 7.54,27.74 7.39,27.74 R7.2 | 7.84,27.43 7.84,26.98 7.69,26.82 7.39,26.82 R5.2 | 8.15,32 8.6,32 8.91,31.7 8.91,31.09 8.6,30.79 7.54,30.79 7.39,30.94 R8.2 | 8.15,32 7.39,32 R_PWR_EPD.2 | v8.15,27.74 7.84,27.43 | 8.15,32 v8.15,32.31 | 10.89,24.08 11.2,24.38 11.35,24.38 11.96,24.99 11.96,25.45 12.57,26.06 14.24,26.06 14.39,25.91 14.39,23.47 14.55,23.32 14.55,22.4 13.94,21.79 C34.1 | 10.89,24.08 9.37,22.55 9.37,10.97 9.06,10.67 9.06,8.54 7.99,7.47 3.42,7.47 DMG2305UX-7.2 | 10.89,24.08 v10.13,24.84
  Bottom 0.152: v8.15,32.31 7.69,31.85 7.69,31.09 8.15,30.63 v8.15,27.74 8.15,26.82 v10.13,24.84
3V3/2.4A  (via drill 0.35)  (5 unrouted)
  Top 0.152: 30.25,25.6 30.25,26.98 31.01,27.74 31.01,31.55 30.55,32 | 30.25,25.6 30.25,25.3 U1.P$A22 | 30.55,32 30.09,32 IC9.E2 | 30.55,32 IC9.E3 | 25.06,18.29 24.76,18.59 24.76,20.27 U1.P$W1 | 25.06,18.29 27.81,18.29 28.11,18.59 | 28.11,18.59 28.26,18.74 U1.P$AD14 | v11.04,32 8.91,34.14 6.62,34.14 R17.2 | v20.95,16.61 21.86,16.61 v22.17,16.92 | 25.06,18.29 v24.91,18.14 | v42.59,7.16 42.59,7.77 IC3.3 | 30.25,25.6 30.85,25.6 32.99,23.47 32.99,19.96 31.31,18.29 28.42,18.29 28.11,18.59
  Bottom 0.152: v11.04,32 20.95,22.1 v20.95,16.61 | 23.69,16.92 v22.17,16.92 | v24.91,18.14 23.69,16.92 | v42.59,7.16 40,7.16 35.73,11.43 33.14,11.43 28.87,15.7 24.91,15.7 23.69,16.92
DEC1
  Top 0.152: U1.P$C1 24.76,24.23 25.06,24.54 25.06,24.99 22.63,27.43 15.61,27.43 15.46,27.59 8.91,27.59 7.54,26.21 5.1,26.21 4.49,26.82 2.81,26.82 2.66,26.98 2.66,27.28 C5.1
DEC3  (1 unrouted)
DEC4_6  (via drill 0.35)  (1 unrouted)
  Top 0.152: v32.07,23.32 31.62,23.77 31.16,23.77 U1.P$E24 | v32.07,13.41 32.07,12.04 31.92,11.89 L3.2
  Bottom 0.152: v32.07,23.32 32.07,20.88 31.77,20.57 31.77,13.72 v32.07,13.41
DN  (via drill 0.35)
  Top 0.152: 22.78,33.07 22.93,33.22 J4.A7 | 22.78,33.07 22.63,32.92 22.17,32.92 22.02,33.07 22.02,33.83 J4.B7 | v40.45,11.28 40.45,4.57 D3.1 | 22.78,33.07 v23.23,32.61
  Bottom 0.152: v40.45,11.28 40.45,12.5 42.13,14.17 42.13,28.96 36.49,34.59 25.21,34.59 v23.23,32.61
DP  (2 unrouted)
EPD_3V3  (via drill 0.35)
  Top 0.152: 11.35,16.16 11.35,16.46 J3.15 | v12.26,16.16 11.35,16.16 | v12.26,14.94 12.26,14.48 13.18,13.56 13.18,11.12 13.79,10.52 C1-EP-DR.1 | 11.35,16.16 J3.16 | v5.71,8.08 4.79,8.08 3.42,9.45 2.51,9.45 DMG2305UX-7.3 | EPD_C5.2 15.16,14.02 16.07,14.02 v16.22,13.87 16.38,13.87 v17.44,12.8 | v29.03,13.26 30.85,15.09 L5.2
  Bottom 0.152: v12.26,14.94 12.26,15.54 | 12.26,15.54 v12.26,16.16 13.18,17.07 16.53,17.07 16.99,16.61 16.99,15.09 16.22,14.33 v16.22,13.87 | v5.71,8.08 6.32,8.08 9.37,11.12 9.37,14.94 9.98,15.54 12.26,15.54 | v29.03,13.26 19.73,13.26 19.27,12.8 v17.44,12.8
GDR  (2 unrouted)
GND  (via drill 0.35)  (7 unrouted)
  Top 0.152: 30.09,32.92 29.79,32.92 IC9.C1 29.64,32.92 29.64,33.22 | 30.09,32.92 30.4,32.92 IC9.C3 | 30.09,32.92 IC9.C2 | 29.64,33.22 27.04,33.22 J4.SH4 | 29.64,33.22 IC9.B1 | IC1.D2 30.25,27.59 30.25,27.43 29.94,27.13 28.57,27.13 27.04,28.65 27.04,29.11 J4.SH2 | 16.53,32.31 16.53,33.22 C29.1 16.53,33.38 C27.1 | 16.53,32.31 16.53,31.39 | 16.53,32.31 C30.1 | 16.53,31.39 16.53,31.09 16.99,30.63 16.99,30.48 C4.2 17.14,30.33 18.36,29.11 J4.SH1 | v20.03,30.33 18.21,32.16 18.21,32.92 18.36,33.07 18.36,33.22 J4.SH3 | 9.21,31.39 9.21,32.16 8.3,33.07 7.39,33.07 R_TYPE_SEL.2 7.23,33.22 7.08,33.22 6.62,33.68 C37.1 6.47,33.53 5.71,34.29 | 9.21,31.39 9.21,30.94 8.76,30.48 7.39,30.48 R1_USB.1 | 5.71,34.29 5.56,34.44 C33.2 | 6.17,31.7 6.32,31.55 6.47,31.55 C38.1 | 6.17,31.7 6.17,32.31 6.47,32.61 R3.1 | 4.49,31.7 4.49,31.85 C15.2 4.49,32 4.49,32.92 C24.1 4.49,33.07 4.34,33.07 | 4.49,31.7 4.49,30.79 C25.2 | 4.34,33.07 3.73,33.07 C3.2 3.73,32.92 3.73,32.46 3.27,32 C8.2 3.12,31.85 3.12,30.94 C1.2 3.12,30.79 3.12,30.33 | 4.34,33.07 4.34,33.98 | 4.34,33.98 4.34,34.14 C7.2 | 4.49,31.7 6.17,31.7 | 6.01,27.74 6.47,27.74 C23.2 | 6.01,27.74 6.01,27.28 R2_EP_DR.1 | 6.01,27.74 R2_USB.2 5.86,27.74 5.25,27.74 4.49,28.5 C22.2 4.49,28.65 4.49,29.11 | R9.1 5.86,29.41 5.56,29.72 4.49,29.72 C13.2 4.49,29.57 4.49,29.11 | 1.59,28.04 1.75,28.19 1.75,28.35 C9.2 1.75,29.57 C12.2 1.75,29.72 1.75,30.33 | 1.59,28.04 1.29,27.74 1.29,27.43 C17.1 1.29,27.28 1.29,26.98 1.75,26.52 1.75,26.21 C11.2 | 1.59,28.04 2.66,28.04 2.96,27.74 2.96,27.43 C5.2 | 3.12,30.33 3.12,29.72 C21.2 3.12,29.57 3.57,29.11 4.49,29.11 | 1.75,30.33 1.75,30.79 C14.2 1.75,30.94 1.75,31.85 C20.2 1.9,32 2.05,32.16 2.05,32.92 C6.2 2.2,32.92 2.81,33.53 2.81,33.83 C10.2
  Top 0.152: 1.75,30.33 3.12,30.33 | 5.71,34.29 5.4,33.98 4.34,33.98 | 9.21,31.39 16.53,31.39 | 16.53,31.39 C31.1 | EPD_C7.1 13.94,11.73 13.94,12.8 EPD_C6.1 13.79,12.95 13.79,14.02 EPD_C5.1 13.79,14.17 13.79,15.39 EPD_C2.1 13.79,15.54 | 13.79,15.54 11.35,15.54 J3.17 | 13.79,15.54 13.79,16.61 EPD_C8.1 13.94,16.76 14.39,17.22 14.39,18.59 13.94,19.05 EPD_C9.1 13.79,19.81 13.48,20.12 | C42.2 15.16,22.86 15.16,21.79 C34.2 15,21.64 13.94,20.57 EPD_C10.1 | EPD_C12.1 13.79,24.23 13.79,25.15 C43.1 13.63,25.3 13.33,25.6 12.57,25.6 12.26,25.3 v12.26,22.55 | 13.48,20.12 v12.26,20.12 11.35,20.12 J3.8 | 13.48,20.12 13.79,20.42 EPD_C10.1 | 13.48,20.12 EPD_C10.1 | C32.2 6.47,8.99 8.3,8.99 EPD_C1.1 8.45,9.14 8.6,9.3 8.6,11.12 J3.MP2 8.6,11.28 8.6,23.32 | 8.6,23.32 8.6,24.23 J3.MP1 8.76,24.38 11.65,27.28 15.31,27.28 15.46,27.13 16.53,27.13 | 16.53,27.13 18.36,27.13 | 18.36,27.13 20.49,27.13 22.63,24.99 23.08,24.99 TP_BAT_GND.TP | 8.6,23.32 v9.21,23.32 | 2.36,5.03 2.51,5.18 U3.9 | 2.36,5.03 1.9,4.57 1.59,4.57 U3.4 | 2.36,5.03 3.42,5.03 U3.6 3.57,5.03 5.4,5.03 6.01,5.64 10.74,5.64 11.04,5.94 SW_DN.1 11.04,6.1 11.8,6.86 11.8,8.38 | 2.36,5.03 U3.9 | U3.1 1.59,5.94 1.9,5.94 2.51,5.33 U3.9 | 11.8,8.38 10.89,9.3 10.89,10.21 11.2,10.52 11.8,10.52 12.87,9.45 14.55,9.45 15,9.91 15,10.36 C1-EP-DR.2 | 42.59,9.91 42.89,9.91 43.05,9.75 43.05,9.45 IC3.7 43.2,9.45 43.35,9.45 43.66,9.14 43.66,6.4 40.76,3.5 40.45,3.5 D3.2 | 42.59,9.91 41.83,9.91 41.67,9.75 41.67,9.45 IC3.10 | 30.85,6.71 31.01,6.71 IC2.B1 | 30.85,6.71 30.55,7.01 30.55,7.31 30.85,7.62 | 30.85,7.62 32.07,7.62 32.38,7.31 32.38,7.01 | 32.38,7.01 32.07,6.71 IC2.B3
  Top 0.152: 27.5,8.84 27.96,9.3 29.64,9.3 30.85,8.08 30.85,7.62 | 27.5,8.84 27.2,8.54 EPD_C11.1 27.5,8.84 | 24.15,8.23 25.67,9.75 26.59,9.75 27.5,8.84 | 24.15,8.23 22.63,6.71 22.63,6.55 22.32,6.25 SW_ENT.1 | 34.82,6.25 33.14,6.25 32.38,7.01 | 30.85,6.71 30.55,6.4 30.55,6.1 28.42,3.96 28.42,2.44 D4.1 | 37.71,9.14 37.71,10.06 SJ1.1 | 34.82,6.25 37.71,9.14 | 34.82,6.25 SW_UP.1 | v42.59,10.21 42.59,9.91 | v39.24,8.84 38.02,8.84 37.71,9.14 | 11.8,8.38 13.33,8.38 13.79,8.84 15.16,8.84 18.36,12.04 18.36,13.72 18.66,14.02 | 18.66,14.02 19.27,14.02 20.19,13.11 20.19,12.19 24.15,8.23 | 16.53,27.13 16.53,17.07 18.66,14.94 18.66,14.02 | 18.36,27.13 v18.36,26.82
  Bottom 0.152: J4.SH4 27.04,33.22 27.04,29.26 J4.SH2 26.89,29.11 21.25,29.11 v20.03,30.33 19.58,30.33 18.51,29.26 J4.SH1 18.36,29.11 v18.36,26.82 | v12.26,20.12 v12.26,22.55 9.98,22.55 v9.21,23.32 | v42.59,10.21 40.61,10.21 v39.24,8.84
IMU_INT1  (1 unrouted)
IMU_INT2  (1 unrouted)
LX1  (via drill 0.35)  (1 unrouted)
  Top 0.152: v30.85,26.21 31.31,26.67 31.31,32.61 30.7,33.22 30.55,33.22 IC9.B3 | v28.72,17.68 28.72,16.76 29.03,16.46 v29.03,14.17 | v26.28,9.14 26.28,7.01 26.74,6.55 L7.1
  Bottom 0.152: v30.85,26.21 30.85,19.81 v28.72,17.68 | v29.03,14.17 29.64,13.56 29.64,12.5 v26.28,9.14
LX2  (1 unrouted)
  Top 0.152: IC9.D2 30.4,32.46 IC9.D3
N$2  (via drill 0.35)
  Top 0.152: v21.86,30.33 27.35,30.33 27.96,29.72 27.96,28.19 28.72,27.43 29.33,27.43 29.48,27.59 29.79,27.59 IC1.D1 | v5.1,29.11 5.56,29.11 5.86,28.8 R9.2
  Bottom 0.152: v21.86,30.33 21.41,30.33 20.49,31.24 18.66,31.24 15.61,34.29 9.21,34.29 5.86,30.94 5.86,29.87 v5.1,29.11
N$5  (1 unrouted)
N$6  (1 unrouted)
N$8
  Top 0.152: IC3.9 42.13,9.45 42.44,9.45 IC3.8
N$9  (1 unrouted)
N$10  (via drill 0.35)  (1 unrouted)
  Top 0.152: v20.34,6.25 20.34,4.42 19.42,3.5 19.42,2.29 Q3.3 | v9.67,6.25 8.91,6.25 8.6,6.55 MBR0530.2 | v24.45,11.73 26.28,13.56 26.28,15.09 L5.1
  Bottom 0.152: v9.67,6.25 v20.34,6.25 20.34,7.62 v24.45,11.73
N$11  (1 unrouted)
N$13  (1 unrouted)
N$15
  Top 0.152: L2.2 29.79,11.89 30.7,11.89 L3.1
N$16  (1 unrouted)
N$18  (1 unrouted)
N$24  (1 unrouted)
N$26  (via drill 0.35)
  Top 0.152: v12.26,17.83 13.79,17.83 C2-EP-DR.1 | v5.1,3.5 5.1,2.59 D2.1 | v29.94,2.44 31.77,2.44 D4.2
  Bottom 0.152: v12.26,17.83 11.8,17.83 8.3,14.33 8.3,10.52 6.47,8.69 5.4,8.69 5.1,8.38 5.1,4.42 | v5.1,3.5 5.1,4.42 | v29.94,2.44 26.74,5.64 7.84,5.64 6.62,4.42 5.1,4.42
N$27  (1 unrouted)
N$29  (1 unrouted)
N$32  (via drill 0.35)
  Top 0.152: v24.76,29.72 29.18,25.3 U1.P$A18 | v5.25,30.79 4.64,30.18 4.18,30.18 4.03,30.02 4.03,29.72 C13.1
  Bottom 0.152: v24.76,29.72 21.25,33.22 21.25,33.38 20.03,34.59 9.06,34.59 v5.25,30.79
N$33  (1 unrouted)
N$35  (1 unrouted)
N$48  (1 unrouted)
N$51  (via drill 0.35)
  Top 0.152: v32.38,20.27 32.38,22.1 31.31,23.16 31.01,23.16 30.85,23.01 U1.P$H23 | v32.38,15.24 32.38,14.02 32.68,13.72 32.68,11.73 32.23,11.28 27.2,11.28 26.74,11.73 L1.1
  Bottom 0.152: v32.38,15.24 v32.38,20.27
N$54  (via drill 0.35)
  Top 0.152: v9.82,29.41 7.39,29.41 R1_EP_DR.1 | v9.82,32 8.15,33.68 7.39,33.68 R_TYPE_SEL.1 | v19.88,16.31 19.88,14.78 24.61,10.06 26.74,10.06 27.04,9.75 31.16,9.75 32.68,11.28 38.47,11.28 39.24,10.52 39.24,10.21 SJ1.2
  Bottom 0.152: v9.82,32 v9.82,29.41 11.65,27.59 11.65,24.54 v19.88,16.31
N$59  (1 unrouted)
N$60  (via drill 0.35)
  Top 0.152: v12.87,21.18 12.11,21.95 11.35,21.95 J3.4 | v17.29,14.48 16.07,14.48 15.16,15.39 EPD_C2.2
  Bottom 0.152: v12.87,21.18 17.29,16.76 v17.29,14.48
N$61
  Top 0.152: J3.5 11.2,21.49 10.89,21.49 9.67,20.27 9.67,9.14 EPD_C1.2
N$62
  Top 0.152: J3.19 11.35,14.48 11.8,14.48 12.87,13.41 12.87,10.21 13.33,9.75 14.39,9.75 14.55,9.91 14.55,11.12 15.16,11.73 EPD_C7.2
N$63  (via drill 0.35)
  Top 0.152: v10.28,14.02 11.2,14.02 J3.20 | v16.07,15.54 15.77,15.85 15.77,16 15.16,16.61 EPD_C8.2
  Bottom 0.152: v10.28,14.02 14.55,14.02 v16.07,15.54
N$64  (via drill 0.35)
  Top 0.152: v12.26,13.11 11.35,13.11 J3.22 | v11.04,24.99 13.02,26.98 15.16,26.98 15.77,26.36 15.77,21.18 15.16,20.57 EPD_C10.2
  Bottom 0.152: v12.26,13.11 16.83,13.11 17.9,14.17 17.9,17.83 11.04,24.69 v11.04,24.99
N$65  (1 unrouted)
N$66  (via drill 0.35)
  Top 0.152: v10.28,14.94 11.2,14.94 J3.18 | v11.5,9.91 11.96,9.91 12.72,9.14 15,9.14 15.77,9.91 15.77,12.34 15.16,12.95 EPD_C6.2
  Bottom 0.152: v10.28,14.94 9.67,14.33 9.67,11.73 v11.5,9.91
N$67
  Top 0.152: R1_USB.2 9.37,29.87 9.52,30.02 15.92,30.02 18.21,27.74 19.73,27.74 21.25,29.26 21.25,33.07 21.41,33.22 21.41,33.83 J4.A5
N$68  (1 unrouted)
OUT+  (1 unrouted)
OUT-  (via drill 0.35)
  Top 0.152: v31.92,5.49 31.92,6.1 IC2.C3 | v28.57,10.36 24.76,10.36 22.17,12.95 22.17,14.63 23.23,15.7 TP_ON.TP
  Bottom 0.152: v31.92,5.49 31.92,7.01 v28.57,10.36
P0.13/1.5D  (via drill 0.35)  (1 unrouted)
  Top 0.152: v19.42,28.35 19.42,29.41 19.12,29.72 19.12,30.33 17.9,31.55 17.75,31.55 16.99,32.31 C30.2 | v36.95,7.16 37.56,6.55 37.56,6.25 SW_UP.2
  Bottom 0.152: v19.42,28.35 19.42,24.08 21.56,21.95 21.56,16.61 23.39,14.78 29.33,14.78 v36.95,7.16
P0.14/1.5D  (via drill 0.35)  (1 unrouted)
  Top 0.152: v17.6,30.94 17.44,30.94 16.99,31.39 C31.2 | v8.3,31.39 7.39,31.39 R8.1
  Bottom 0.152: v17.6,30.94 13.02,30.94 11.35,32.61 9.52,32.61 v8.3,31.39
P1.01/1.6C  (1 unrouted)
P1.02/1.6C  (via drill 0.35)  (1 unrouted)
  Top 0.152: v13.79,28.35 7.39,28.35 R7.1 | v17.14,24.99 17.14,16.92 20.8,13.26 v20.8,12.65 | v16.07,8.84 16.07,7.62 14.55,6.1 14.09,6.1 SW_DN.2
  Bottom 0.152: v17.14,24.99 v13.79,28.35 | v20.8,12.65 19.88,12.65 v16.07,8.84
PMIC_INT  (1 unrouted)
PREVGH  (via drill 0.35)
  Top 0.152: v10.28,13.11 10.59,13.41 11.2,13.41 J3.21 | v16.22,16.46 16.22,17.98 15.16,19.05 EPD_C9.2 | v7.39,6.71 5.1,6.71 MBR0530.1
  Bottom 0.152: 11.35,13.11 v10.28,13.11 | 11.35,13.11 11.96,13.72 15.16,13.72 16.68,15.24 16.68,16 v16.22,16.46 | v7.39,6.71 7.99,6.71 10.59,9.3 11.8,9.3 12.11,9.6 12.11,12.34 11.35,13.11
PREVGL  (via drill 0.35)
  Top 0.152: v10.28,10.21 10.28,11.89 10.89,12.5 11.2,12.5 J3.23 | v6.32,5.03 6.32,4.72 8.45,2.59 D2.2 | v29.48,8.54 28.57,8.54 EPD_C11.2
  Bottom 0.152: v10.28,10.21 9.98,10.21 6.32,6.55 6.32,6.1 | v6.32,5.03 6.32,6.1 | v29.48,8.54 25.98,8.54 25.06,9.45 25.06,12.04 24.76,12.34 21.41,12.34 17.29,8.23 9.98,8.23 7.84,6.1 6.32,6.1
RESE  (via drill 0.35)  (1 unrouted)
  Top 0.152: v11.2,28.96 11.04,28.8 7.39,28.8 R1_EP_DR.2 | v17.75,19.36 17.75,18.59 17.6,18.44 17.6,17.37 v18.97,16 | v18.97,13.41 18.97,10.36 17.9,9.3 17.9,3.5 18.21,3.2 18.21,2.44 17.44,1.68 Q3.2
  Bottom 0.152: v11.2,28.96 11.2,28.5 12.26,27.43 12.26,24.69 17.6,19.36 v17.75,19.36 | v18.97,13.41 v18.97,16
RESET  (2 unrouted)
RF  (via drill 0.35)
  Top 0.152: v28.26,16.31 28.26,12.34 27.81,11.89 L1.2 | v33.14,32.31 33.14,33.22 33.6,33.68 ANT1.1
  Bottom 0.152: v28.26,16.31 31.46,19.51 31.46,29.87 33.14,31.55 v33.14,32.31
SCL/1.4C  (1 unrouted)
SCL/2.4C  (via drill 0.35)  (2 unrouted)
  Top 0.152: v22.63,30.94 27.2,30.94 29.64,28.5 29.79,28.5 IC1.B1 | v10.28,33.68 9.82,33.68 8.91,34.59 6.62,34.59 R17.1
  Bottom 0.152: v22.63,30.94 22.63,30.18 22.17,29.72 21.56,29.72 20.34,30.94 18.51,30.94 15.77,33.68 v10.28,33.68
SDA/1.4C  (1 unrouted)
SDA/2.4C  (via drill 0.35)  (2 unrouted)
  Top 0.152: v29.03,28.04 29.79,28.04 IC1.C1 | v32.38,31.7 34.66,31.7 34.82,31.85 39.24,31.85 42.13,28.96 42.13,10.67 41.06,9.6 41.06,7.62 41.22,7.47 41.83,7.47 42.13,7.77 IC3.2
  Bottom 0.152: v29.03,28.04 29.03,28.35 v32.38,31.7
SWDCLK  (2 unrouted)
SWDIO  (2 unrouted)
VBAT/1.2A  (via drill 0.35)  (1 unrouted)
  Top 0.152: v20.19,29.11 19.42,29.87 19.42,30.48 17.44,32.46 17.44,33.38 16.99,33.83 16.99,34.29 C27.2 | v25.37,16.31 25.37,15.39 23.54,13.56 TP_VBAT.TP | U3.3 1.44,5.03 1.44,5.49 U3.2
  Bottom 0.152: v20.19,29.11 20.19,23.77 25.52,18.44 25.52,16.46 v25.37,16.31
VBAT/2.5C  (1 unrouted)
VBUS/1.5D  (via drill 0.35)  (3 unrouted)
  Top 0.152: v12.87,24.99 12.87,23.93 13.79,23.01 C42.1 | v14.85,26.36 14.85,25.45 15,25.3 C43.2
  Bottom 0.152: v12.87,24.99 13.48,24.99 v14.85,26.36
VBUS/2.6D  (2 unrouted)
VREG  (via drill 0.35)  (1 unrouted)
  Top 0.152: IC9.A2 29.79,33.68 IC9.A1 | v30.4,31.24 30.7,30.94 30.7,28.8 30.4,28.5 30.25,28.5 IC1.B2 | v31.16,33.68 30.55,33.68 IC9.A3 30.4,33.68 IC9.A2 | IC9.A2
  Bottom 0.152: v30.4,31.24 30.4,32.92 v31.16,33.68